# Altium PCB PCB.PcbDoc
Units mil, origin at the board's own origin, x right, y up, seen from the top; angles counter-clockwise.
Board outline 2305 x 3695 mil, 2 copper layers (Top Layer, Bottom Layer); 50 components, 62 nets, 204 pads, 75 vias.
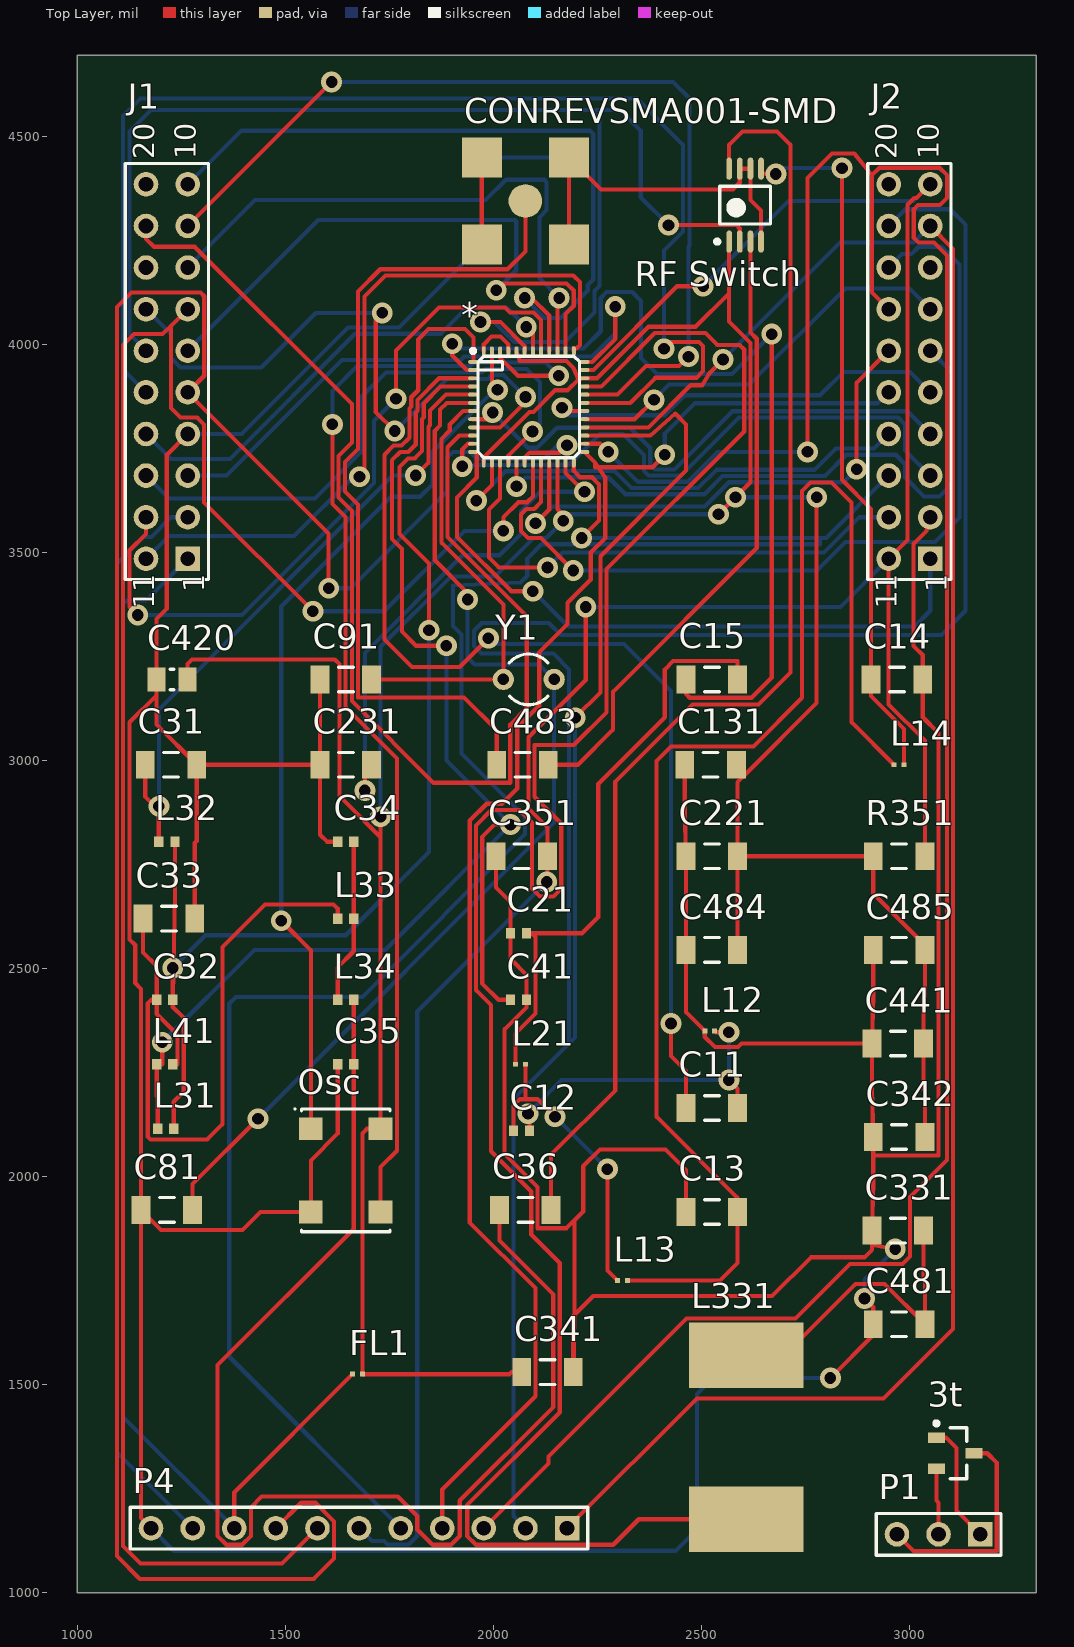
[diagram p0: Top Layer view]
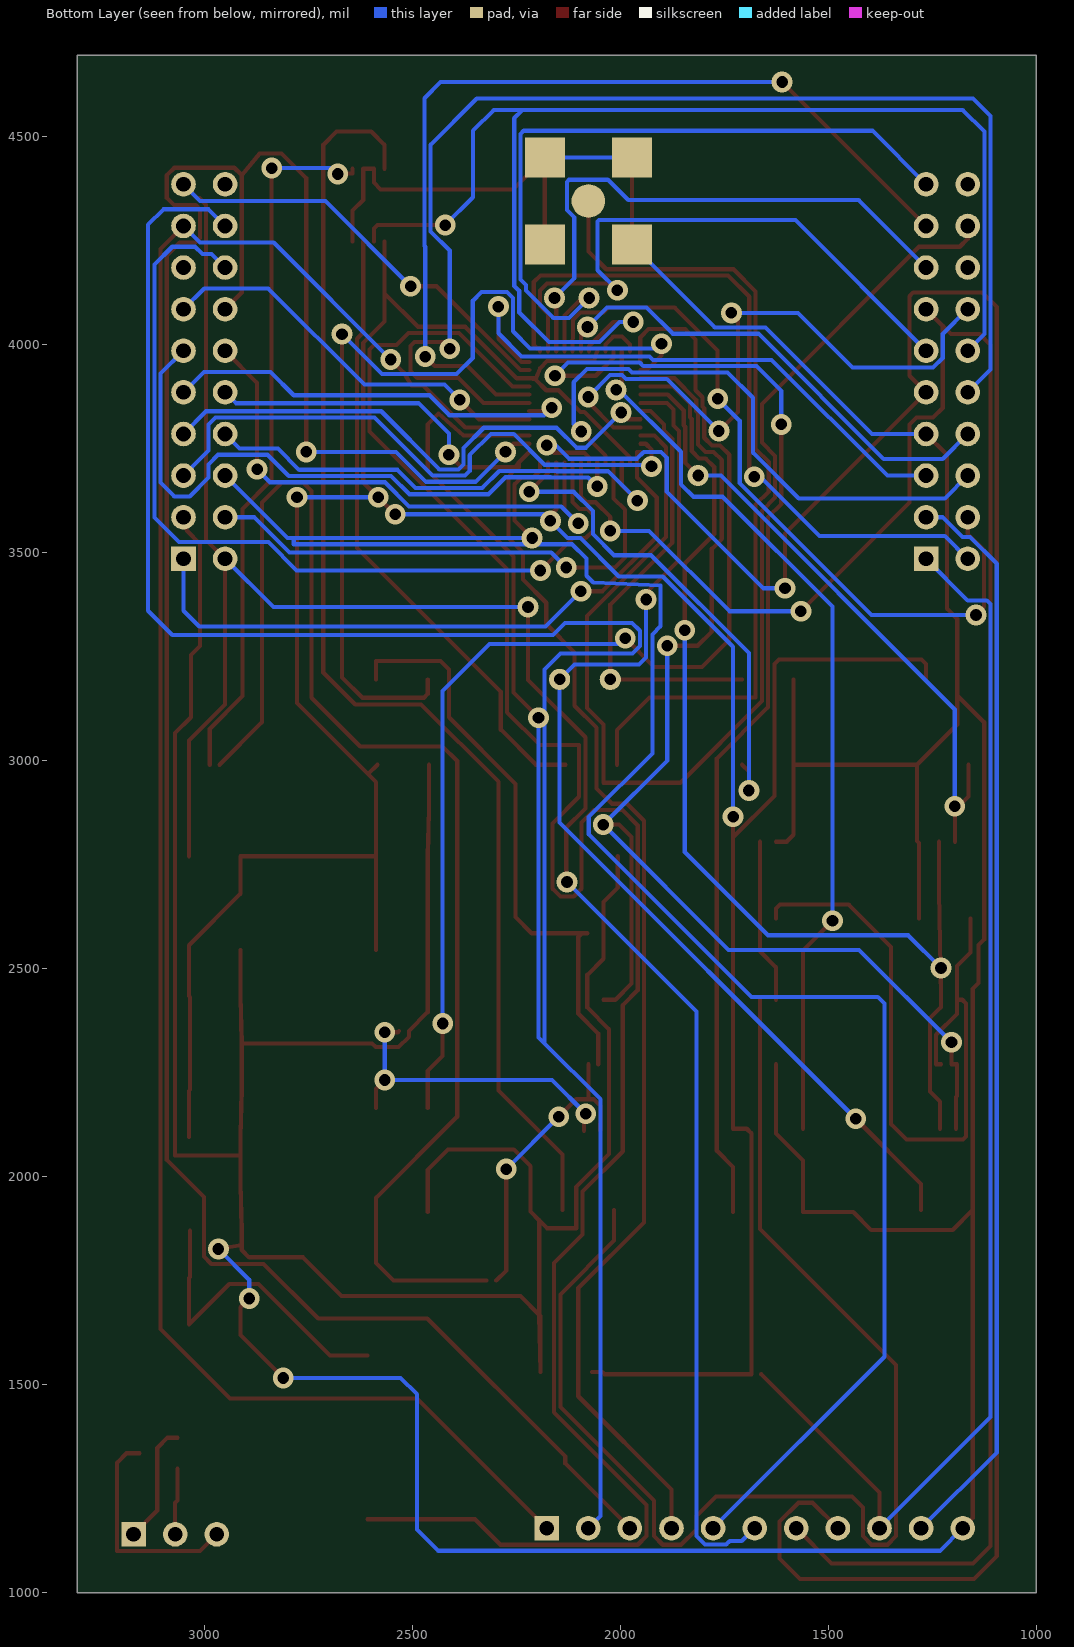
[diagram p1: Bottom Layer view, seen from below]

## Layer stack, top to bottom
Top Solder: solder mask 0.4, Solder Resist, Dk 3.5
Top Layer: signal copper 1.4
Dielectric 1: dielectric 12.6, FR-4, Dk 4.8
Bottom Layer: signal copper 1.4
Bottom Solder: solder mask 0.4, Solder Resist, Dk 3.5

## Board outline
1000,1000 3305,1000 3305,4695 1000,4695

## Design rules (kind name [scope] priority, off if disabled: settings)
Clearance [All] p1: gap=5 ignorepadtopadclearanceinfootprint=TRUE
PolygonConnect [All] p1: connectstyle=Relief reliefconductorwidth=10 reliefentries=4 polygonreliefangle="90 Angle" airgapwidth=10
RoutingVias [All] p1: holewidth=28 width=50 viastyle="Through Hole" minholewidth=28 minwidth=50 maxholewidth=28 maxwidth=50
SolderMaskExpansion [All] p1: expansion=4
Width [All] p1: maxlimit=10 minlimit=10 preferedwidth=10
30 further rules are at their usual default settings.

## Classes and differential pairs
component class Sheet2: J1 J2 P4
component class Sheet1: 3t * C11 C12 C13 C14 C15 C21 C31 C32 C33 C34 C35 C36 C41 C81 C91 C131 C221 C231 C331 C341 C342 C351 C420 C441 C481 C483 C484 C485 CONREVSMA001-SMD FL1 L12 L13 L14 L21 L31 L32 L33 L34 L41 L331 Osc P1 R351 "RF Switch" Y1

## Components (designator, comment, footprint, x,y, rotation, side; value= is the part's Value field where it differs from the comment)
3t "Temp" SOT95P237X112-3N 3110,1335 r0 top
* "CC1352R1F3RGZ_1" CC1352R 2085,3850 r0 top
C11 "Cap" "1206 Real" 2525,2165 r0 top value=12pF
C12 "Cap" "0402 Real" 2067.68,2110 r180 top value=1.1pF
C13 "Cap" "1206 Real" 2525,1915 r0 top value=1pF
C14 "Cap" "1206 Real" 2970,3195 r180 top value=1pF
C15 "Cap" "1206 Real" 2525,3195 r0 top value=12pF
C21 "Cap" "0402 Real" 2060,2585 r0 top value=1.1pF
C31 "Cap" "1206 Real" 1225,2990 r0 top value=100pF
C32 "Cap" "0402 Real" 1210,2425 r180 top value=3.6pF
C33 "Cap" "1206 Real" 1220,2620 r180 top value=2.7pF
C34 "Cap" "0402 Real" 1645,2805 r0 top value=6.2pF
C35 "Cap" "0402 Real" 1645,2270 r0 top value=3pF
C36 "Cap" "1206 Real" 2076.81,1920 r0 top value=100pF
C41 "Cap" "0402 Real" 2060,2425 r180 top value=3.6pF
C81 "Cap" "1206 Real" 1215,1920 r180 top value=12pF
C91 "Cap" "1206 Real" 1645.35,3195 r180 top value=12pF
C131 "Cap" "1206 Real" 2522.01,2990 r180 top value=0.1uF
C221 "Cap" "1206 Real" 2525,2770 r180 top value=0.1uF
C231 "Cap" "1206 Real" 1645.35,2990 r180 top value=1uF
C331 "Cap" "1206 Real" 2972.01,1870 r180 top value=22uF
C341 "Cap" "1206 Real" 2130,1530 r0 top value=22uF
C342 "Cap" "1206 Real" 2975,2095 r180 top value=0.1uF
C351 "Cap" "1206 Real" 2067.99,2770 r180 top value=0.1uF
C420 "Cap" "0805 Real" 1227.4,3195 r180 top value=0.01uF
C441 "Cap" "1206 Real" 2972.01,2320 r180 top value=0.1uF
C481 "Cap" "1206 Real" 2975,1645 r180 top value=0.1uF
C483 "Cap" "1206 Real" 2070,2990 r180 top value=12pF
C484 "Cap" "1206 Real" 2525,2545 r180 top value=12pF
C485 "Cap" "1206 Real" 2975,2545 r180 top value=12pF
CONREVSMA001-SMD "" SMA_Jack 2076.81,4345 r90 top
FL1 "BLM" "0201 Real" 1673.19,1525 r0 top value=2.4nH
J1 "SSQ-110-23-L-D" HDR2X10_CEN 1265,3485 r90 top
J2 "SSQ-110-23-L-D" HDR2X10_CEN 3050,3485 r90 top
L12 "Inductor" "0201 Real" 2520,2350 r180 top value=2.4nH
L13 "Inductor" "0201 Real" 2310,1750 r0 top value=1.5nH
L14 "Inductor" "0201 Real" 2975,2990 r0 top value=2nH
L21 "Inductor" "0201 Real" 2065,2270 r0 top value=2.4nH
L31 "Inductor" "0402 Real" 1212.32,2115 r180 top value=27nH
L32 "Inductor" "0402 Real" 1215,2805 r180 top value=7.5nH
L33 "Inductor" "0402 Real" 1645,2620 r0 top value=6.8nH
L34 "Inductor" "0402 Real" 1645,2425 r0 top value=6.8nH
L41 "Inductor" "0402 Real" 1210,2270 r0 top value=7.5nH
L331 "Inductor" "Non-Standard Inductor" 2607.4,1373.15 r90 top value=6.8mH
Osc "Osc" OSC 1645,2015 r0 top
P1 "Header 3" HDR1X3 3170,1140 r180 top
P4 "BB02-HJ221-KB1-603000" HDR1X11 2177.01,1155 r180 top
R351 "Res3" "1206 Real" 2975,2770 r180 top value=100K
"RF Switch" "PE4250" "RF Switch" 2605,4335 r90 top
Y1 "32.768kHz" R38 2085,3195 r270 top

## Footprints (in the part's own frame and the unit in brackets; to place one, negate y for a bottom-side part, rotate by r counter-clockwise, add the part's x,y. Pads: shape width x height; smd on the part's side, far side on the other; paste and mask are expansions set on the pad)
"0201 Real" [mm] "Chip Inductor, Body 1.0x0.5mm, IPC High Density"
  rect 0.3x0.3 smd: 1(-0.3,0) 2(0.3,0)
  body extent -0.32,-0.17 0.32,0.17, height 0.33
"0402 Real" [mm] "Radial Cap, Thru-Hole; 2 Leads; 0.3 in Pin Spacing"
  rect 0.56x0.64 smd: 1(-0.49,0) 2(0.49,0)
  body extent -0.55,-0.3 0.55,0.3, height 0.6
"0805 Real" [mm] "Radial Cap, Thru-Hole; 2 Leads; 0.3 in Pin Spacing"
  rect 1.1x1.45 smd: 1(-0.95,0) 2(0.95,0)
  silkscreen extent -0.1,-0.62 0.1,0.62, body extent -1.15,-0.72 1.15,0.72, height 1.15
"1206 Real" [mm] "Chip Capacitor, 2-Leads, Body 3.05x1.55mm, IPC Medium Density"
  rect 1.15x1.7 smd: 1(-1.575,0) 2(1.575,0)
  silkscreen extent -0.45,-0.75 0.45,0.75, body extent -1.6,-0.85 1.6,0.85, height 0.65
CC1352R [mm] "CQFP, 48-Leads, Body 7,40x7,40mm, Pitch 0,50mm, IPC Medium Density"
  oval 0.6x0.24 smd: 1(-3.4,2.75) 2(-3.4,2.25) 3(-3.4,1.75) 4(-3.4,1.25) 5(-3.4,0.75) 6(-3.4,0.25) 7(-3.4,-0.25) 8(-3.4,-0.75) 9(-3.4,-1.25) 10(-3.4,-1.75) 11(-3.4,-2.25) 12(-3.4,-2.75) 25(3.4,-2.75) 26(3.4,-2.25) 27(3.4,-1.75) 28(3.4,-1.25) 29(3.4,-0.75) 30(3.4,-0.25) 31(3.4,0.25) 32(3.4,0.75) 33(3.4,1.25) 34(3.4,1.75) 35(3.4,2.25) 36(3.4,2.75)
  oval 0.24x0.6 smd: 13(-2.75,-3.4) 14(-2.25,-3.4) 15(-1.75,-3.4) 16(-1.25,-3.4) 17(-0.75,-3.4) 18(-0.25,-3.4) 19(0.25,-3.4) 20(0.75,-3.4) 21(1.25,-3.4) 22(1.75,-3.4) 23(2.25,-3.4) 24(2.75,-3.4) 37(2.75,3.4) 38(2.25,3.4) 39(1.75,3.4) 40(1.25,3.4) 41(0.75,3.4) 42(0.25,3.4) 43(-0.25,3.4) 44(-0.75,3.4) 45(-1.25,3.4) 46(-1.75,3.4) 47(-2.25,3.4) 48(-2.75,3.4)
  silkscreen extent -3.52,-3.1 3.1,3.54, body extent -3.5,-3.5 6.98,3.5, height 1
HDR1X3 [mm] "Connector; Header; 3 Position"
  rect 1.5x1.5 hole 0.9: 1(0,0)
  round 1.5 hole 0.9: 2(2.54,0) 3(5.08,0)
  silkscreen extent -1.27,-1.27 6.35,1.27
HDR1X11 [mm] "Connector; Header; 11 Position"
  rect 1.5x1.5 hole 0.9: 1(0,0)
  round 1.5 hole 0.9: 2(2.54,0) 3(5.08,0) 4(7.62,0) 5(10.16,0) 6(12.7,0) 7(15.24,0) 8(17.78,0) 9(20.32,0) 10(22.86,0) 11(25.4,0)
  silkscreen extent -1.27,-1.27 26.67,1.27
HDR2X10_CEN [mm] "Connector; Header; 10x2 Position"
  rect 1.5x1.5 hole 0.9: 1(0,0)
  round 1.5 hole 0.9: 2(2.54,0) 3(5.08,0) 4(7.62,0) 5(10.16,0) 6(12.7,0) 7(15.24,0) 8(17.78,0) 9(20.32,0) 10(22.86,0) 11(0,2.54) 12(2.54,2.54) 13(5.08,2.54) 14(7.62,2.54) 15(10.16,2.54) 16(12.7,2.54) 17(15.24,2.54) 18(17.78,2.54) 19(20.32,2.54) 20(22.86,2.54)
  silkscreen extent -1.27,-1.27 24.13,3.81
"Non-Standard Inductor" [mm] "Chip Inductor, Body 1.0x0.5mm, IPC High Density"
  rect 4x7 smd: 1(-5,0) 2(5,0)
OSC [mm] "SON, 4-Leads, Body 7,00x5,08mm, Pitch 5,08mm, IPC Medium Density"
  rect 1.45x1.4 smd: 1O(-2.13,2.54) 2O(-2.13,-2.54) 3O(2.13,-2.54) 4O(2.13,2.54)
  silkscreen extent -3.15,-3.75 2.7,3.8, body extent -2.54,-2.54 2.54,2.54, height 1.27
R38 [mm] "Crystal, Thru-Hole; 2 Leads; Body 3.1 x 8.2 mm (Dia.xH)"
  round 1.3 hole 0.7: 1(0,1.55) 2(0,-1.55)
  silkscreen extent -1.55,-1.19 1.55,1.17
"RF Switch" [mm] "TSOP, 8-Leads, Body 3.00x3.00mm, Pitch 0.65mm, IPC Medium Density"
  oval 1.35x0.35 smd: 1P(-2.225,0.975) 2P(-2.225,0.325) 3P(-2.225,-0.325) 4P(-2.225,-0.975) 5P(2.225,-0.975) 6P(2.225,-0.325) 7P(2.225,0.325) 8P(2.225,0.975)
  silkscreen extent -2.35,-1.55 1.15,1.82, body extent -1.55,-1.55 1.55,1.55, height 0.92
SMA_Jack [mm] "Connector; RF Coaxial, MMCX, Thru-Hole; 5 Position; Vertical"
  round 2.05 all layers, no hole: 1(0,0)
  rect 2.44x2.44 all layers, no hole: 2(-2.66,2.66) 3(-2.66,-2.66) 4(2.66,2.66) 5(2.66,-2.66)
SOT95P237X112-3N [mm] "SOT23, 3-Leads, Body 2,86x2,37mm, Pitch 0,95mm, IPC Medium Density"
  rect 1.05x0.65 smd: 1T(-1.15,0.95) 2T(-1.15,-0.95) 3T(1.15,0)
  silkscreen extent -1.27,-1.55 0.7,1.95, body extent -0.7,-1.52 0.7,1.53, height 1.12

## Part data
C11 C12 C13 C14 C15 C21 C31 C32 C33 C34 C35 C36 C41 C81 C91 C131 C221 C231 C331 C341 C342 C351 C420 C441 C481 C483 C484 C485: "Capacitor", LatestRevisionDate=17-Jul-2002, LatestRevisionNote="Re-released for DXP Platform.", PackageDescription="Radial Cap, Thru-Hole; 2 Leads; 0.3 in Pin Spacing", PackageReference=RAD-0.3, Published=8-Jun-2000, Publisher="Altium Limited"
CONREVSMA001-SMD: library part COAX-M, "RF Coaxial PCB Connector, MMCX; Thru-Hole, Vertical Mount Plug,  50 Ohm Impedance", PackageDocument="Rev. A, 16-Jun-1997", ComponentLink1Description="Manufacturer Link", ComponentLink1URL=http://www.amphenolrf.com/, DatasheetDocument=30-May-2003, DrillSize="Corresponds to nominal value.", LatestRevisionDate=15-Jul-2004, LatestRevisionNote="Component Replaced.", PackageReference=908-21103, PCB_Layout="Complies with manufacturer's recommendation.", Published=15-Jul-2004, Publisher="Altium Limited"
FL1: library part Inductor, "Inductor", Code_IEC=1005, Code_JEITA=0402, LatestRevisionDate=29-May-2009, LatestRevisionNote="IPC-7351 Footprint Added.", PackageDescription="Chip Inductor", PackageReference=0402-A, Published=8-Jun-2000, Publisher="Altium Limited"
P1: "Header, 3-Pin", LatestRevisionDate=17-Jul-2002, LatestRevisionNote="Re-released for DXP Platform.", Publisher="Altium Limited"
P4: library part "Header 11", "Header, 11-Pin", LatestRevisionDate=17-Jul-2002, LatestRevisionNote="Re-released for DXP Platform.", Publisher="Altium Limited"
R351: "Resistor", LatestRevisionDate=29-May-2009, LatestRevisionNote="IPC-7351 Footprint Added.", PackageDescription="Chip Resistor", PackageReference=J1-0603, Published=8-Jun-2000, Publisher="Altium Limited"
Y1: library part XTAL, "Crystal Oscillator", LatestRevisionDate=17-Jul-2002, LatestRevisionNote="Re-released for DXP Platform.", PackageDescription="Crystal, Thru-Hole; 2 Leads; Body 3.1 x 8.2 mm (Dia.xH)", PackageReference=R38, Published=8-Jun-2000, Publisher="Altium Limited"
L12 L13 L14 L21 L31 L32 L33 L34 L41 L331: Code_IEC=1005, Code_JEITA=0402, LatestRevisionDate=29-May-2009, LatestRevisionNote="IPC-7351 Footprint Added.", PackageDescription="Chip Inductor", PackageReference=0402-A, Published=8-Jun-2000, Publisher="Altium Limited"

## Via types
v1: diameter 50, hole 28, Top Layer to Bottom Layer, 75 vias

## Nets (pads, with @x,y where several pads share a name; then routed paths per layer and width w, separated by ;. In a path a pad name is that pad's centre, name@x,y a point inside that pad or via, vN(x,y) a via of type N, cw(c..) or ccw(c..) an arc to the next point about the centre after c; other vN are vias at no path point)
5V0_BP: J1.2 P4.10 | length 2609.8
  Bottom Layer w10: J1.2 1225.42,3585 1177.8,3537.38 1159.38,3537.38 1095,3473 1095,1337.01 P4.10
DCDC_SW: *.33 L331.1 | length 5035.8
  Top Layer w10: *.33 2259.39,3899.21 2387.85,4027.67 2509.5,4027.67 2538.17,3999 2592,3999 2603,3988 2603,3791 2272,3460 2272,3116 2193,3037 2099,3037 2099,2913 2163,2849 2163,2692 2144,2673 2112,2673 2093,2692 2093,2851 2063,2881 1994.76,2881 1958,2844.24 1958,2448 1994,2412 1994,2061 2091,1964 2091,1861 2159.37,1792.63 2159.37,1433.37 1937,1211 1937,1136 1958,1115 2288,1115 2349.3,1176.3 L331.1
DIO3: *.8 J2.4 | length 1305.1
  Top Layer w10: *.8 1982,3820.47 v1(1998,3836.47)
  Bottom Layer w10: v1(1998,3836.47) 2082.47,3752 2105.33,3752 2153.33,3800 2328.13,3800 2377,3751.13 2377,3712 2389,3700 2435,3700 2574.53,3839.53 2995.47,3839.53 J2.4
DIO4_SCL: *.9 J1.17 | length 1578.1
  Top Layer w10: v1(1733,4076) 1717,4060 1717,3838 v1(1763,3792) ; *.9 2016,3800.79 2077,3861.79 v1(2077,3874)
  Bottom Layer w10: J1.17 1225,4025 1225,3968 1248,3945 1442,3945 1573,4076 v1(1733,4076) ; v1(1763,3792) 1888.17,3917.17 1986.68,3917.17 1995.98,3926.47 2024.53,3926.47 v1(2077,3874)
DIO5_SDA: *.10 J1.19 | length 2867.3
  Top Layer w10: J1.19 1165,4254 1184,4235 1282,4235 1659.72,3857.28 1659.72,3764.13 1628,3732.41 1628,3632 1659.72,3600.28 1659.72,3142.81 1856,2946.53 2040.63,2946.53 2040.63,3086.63 2080,3126 2080,3347.19 1890,3537.19 1890,3753.15 1917.95,3781.1 *.10
DIO6_RLED: *.11 J2.3 | length 1445.7
  Top Layer w10: v1(1925,3707) 1925,3747.67 1938.75,3761.42 *.11
  Bottom Layer w10: v1(1925,3707) 1928.57,3710.57 2137.57,3710.57 2138,3711 2182,3711 2256,3785 2311,3785 2362,3734 2362,3696 2373,3685 2451,3685 2590.53,3824.53 2973,3824.53 2989.53,3808 2989.53,3745.47 J2.3
DIO7_GLED: *.12 J2.1 | length 1600.3
  Top Layer w10: *.12 1960,3741.73 1960,3680 1912.49,3632.49 1912.49,3537.4 2042.8,3407.1 v1(2094.81,3407.1)
  Bottom Layer w10: v1(2094.81,3407.1) 2179.91,3322 3012,3322 3050,3360 J2.1
DIO8_MISO: *.14 J2.14 | length 1198
  Top Layer w10: v1(1959,3624.89) 1996.42,3662.31 *.14
  Bottom Layer w10: v1(1959,3624.89) 2029.68,3695.57 2152.57,3695.57 2153,3696 2291,3696 2332,3655 2492,3655 2535.88,3698.88 2771.87,3698.88 2822.99,3750 2915,3750 J2.14
DIO9_MOSI: *.15 J2.12 | length 1260.4
  Top Layer w10: *.15 2016.1,3630.1 1989,3603 1989,3488 2013,3464 v1(2130,3464)
  Bottom Layer w10: v1(2130,3464) 2166,3500 2795,3500 2880,3585 J2.12
DIO10_SCLK: *.16 J1.13 | length 1414.3
  Top Layer w10: *.16 2035.79,3732.79 v1(2094,3791)
  Bottom Layer w10: J1.13 1220,3630 1571,3630 1681,3740 1681,3872 1742,3933 1972,3933 1980.47,3941.47 2080,3941.47 2112,3909.47 2112,3809 v1(2094,3791)
DIO11_CS: *.17 J2.6 | length 1585.7
  Top Layer w10: v1(2055.47,3659) *.17
  Bottom Layer w10: v1(2055.47,3659) 2077.04,3680.57 2167.57,3680.57 2168,3681 2276,3681 2317,3640 2507,3640 2550.88,3683.88 2796.88,3683.88 2848,3735 2967,3735 2990,3712 2990,3680 3035,3635 3072,3635 3105,3668 3105,3930 J2.6
DIO14_BTN2: *.20 J2.18 | length 2157.9
  Top Layer w10: *.20 2114.53,3621.41 2098.12,3605 2079,3605 2066,3592 2066,3552 2083,3535 2114,3535 v1(2192,3457)
  Bottom Layer w10: v1(2192,3457) 2778,3457 2846,3525 3061,3525 3120,3584 3120,4192 3077,4235 3022.27,4235 3004.53,4217.26 2982.26,4217.26 J2.18
DIO15_BTN1: *.21 J2.16 | length 1302.6
  Top Layer w10: v1(2101,3570) 2134.21,3603.21 *.21 ; v1(2873,3700) 2873,3908 J2.16
  Bottom Layer w10: v1(2101,3570) 2142,3611 2508,3611 2565.88,3668.88 2841.88,3668.88 v1(2873,3700)
DIO16_TDO: *.26 J2.17 P4.3 | length 6058.2
  Top Layer w10: P4.3 2132.15,1310.14 2132.15,1327.15 2464,1659 2726,1659 2857.29,1790.29 2983.29,1790.29 3001,1808 3001,1951.11 3090,2040.11 3090,4214 3059,4245 3021.47,4245 3010.47,4256 3010.47,4325 3020.47,4335 3073,4335 3090,4352 3090,4407 3072,4425 2928,4425 2910,4407 ; *.26 2256.58,3761.42 v1(2276,3742) ; v1(2755,3742) 2755,4400 2814,4459 2867,4459 2910,4407 ; J2.17 2910,4125 2910,4407
  Bottom Layer w10: v1(2276,3742) 2348,3670 2467,3670 2539,3742 v1(2755,3742)
DIO17_TDI: *.27 J2.19 P4.2 | length 6670.8
  Top Layer w10: v1(2196.5,3103) 2257,3163.5 2257,3491 2463,3697 2463,3808 2437,3834 2377.1,3781.1 *.27
  Bottom Layer w10: P4.2 2048,1184.01 2048,2186 2182,2320 ; v1(2196.5,3103) 2196.5,2334.5 2182,2320 ; J2.19 2990,4325 3098,4325 3135,4288 3135,3360 3077,3302 2162,3302 2133,3331 1972,3331 1953,3312 1953,3275 1971,3257 2144,3257 2182,3219 2182,2320
DIO19_CTS: *.29 J2.7 | length 982.1
  Top Layer w10: *.29 2339.47,3820.47 v1(2386,3867)
  Bottom Layer w10: v1(2386,3867) 2422.5,3903.5 2614.84,3903.5 2846.34,4135 3000,4135 J2.7
DIO20_Flash_CS: *.30 J2.5 | length 1012.9
  Top Layer w10: v1(2165,3848) 2172.84,3840.16 *.30
  Bottom Layer w10: v1(2165,3848) 2183,3830 2411,3830 2459,3878 2785,3878 2841,3934 3001,3934 J2.5
DIO21: *.31 J1.15 | length 3087
  Top Layer w10: *.31 2328.95,3859.84 2389.11,3920 2488,3920 2504,3936 2504,3996.5 2494.5,4006 2426,4006 v1(2410,3990)
  Bottom Layer w10: J1.15 1110,3940 1110,4549 1152,4591 2345,4591 2456,4480 2456,4272 2410,4226 v1(2410,3990)
DIO22: *.32 J1.9 | length 2275.3
  Top Layer w10: J1.9 v1(1611,4631) ; *.32 2298.53,3879.53 2367,3948 2446,3948 v1(2469,3971)
  Bottom Layer w10: v1(1611,4631) 2432,4631 2471,4592 2471,4237 2469,4235 v1(2469,3971)
DIO23_Analog: *.36 J1.3 | length 1408.1
  Top Layer w10: *.36 2237.53,3958.27 2293,4013.74 v1(2293,4091.07)
  Bottom Layer w10: J1.3 1358.06,3685 1636.18,3963.12 1921.65,3963.12 1930,3971.47 2237.4,3971.47 2293,4027.07 v1(2293,4091.07)
DIO24_Analog: *.37 J1.11 | length 1754.5
  Top Layer w10: v1(1678,3682) 1690,3694 1690,4115 1741,4166 2192,4166 2208,4150 2208,3999 2200,3991 2193.27,3991 *.37
  Bottom Layer w10: J1.11 1220,3540 1521,3540 1663,3682 v1(1678,3682)
DIO25_Analog: *.38 J1.6 | length 1460.3
  Top Layer w10: v1(2007,4130.63) 2023.37,4147 2176,4147 2193,4130 2193,4093 2173.58,4073.58 *.38
  Bottom Layer w10: J1.6 1579,4299 2051.6,4299 2055,4295.6 2055,4178.63 v1(2007,4130.63)
DIO26_Analog: *.39 J1.8 | length 1388.2
  Top Layer w10: *.39 2153.9,4107.9 v1(2158,4112)
  Bottom Layer w10: J1.8 1427,4347 1981,4347 2030,4396 2123,4396 2128,4391 2128,4323 2110.53,4305.53 2110.53,4159.47 v1(2158,4112)
DIO27_Analog: *.40 J1.10 | length 1775
  Top Layer w10: v1(2075,4112) 2092,4112 2134.21,4069.79 *.40
  Bottom Layer w10: J1.10 1394,4514 2232,4514 2240,4506 2240,4156.07 2226.76,4142.83 2226.76,4129.76 2161,4064 2123,4064 v1(2075,4112)
DIO28_Analog: *.41 J1.12 | length 1777.8
  Top Layer w10: v1(1145,3350) 1125.47,3369.53 1125.47,3505.47 1165,3545 J1.12 ; v1(1766,3869.69) 1766,3985.75 1869.25,4089 2028,4089 2040,4077 2096,4077 2114,4059 2114,4043 *.41
  Bottom Layer w10: v1(1145,3350) 1396,3350 1713,3667 1713,3816.69 v1(1766,3869.69)
DIO29_Analog: *.42 J1.14 | length 1173.8
  Top Layer w10: v1(2079,4042) 2094.84,4026.16 *.42
  Bottom Layer w10: J1.14 1225,3725 1366.94,3725 1667.94,4026 1874,4026 1937,4089 2032,4089 v1(2079,4042)
GND: "RF Switch.4P" "RF Switch.6P" "RF Switch.7P" C13.1 C14.1 C21.1 C31.2 C33.1 C34.1 C35.1 C41.1 C81.2 C91.2 C131.2 C221.2 C231.2 C331.2 C341.2 C342.2 C351.2 C420.2 C441.2 C481.2 C484.2 C485.2 CONREVSMA001-SMD.2 CONREVSMA001-SMD.3 CONREVSMA001-SMD.4 CONREVSMA001-SMD.5 J1.4 J2.2 L12.2 Osc.2O P4.11 | length 15942.6
  Top Layer w10: P4.11 1152.99,1179.02 C81.2 ; J1.4 1215,3735 1215,3365 1190,3340 C420.2 1190,3156.65 ; C33.1 1282.01,2802 1287.01,2807 C31.2 ; C91.2 C231.2 ; C35.1 1625.71,2103.46 1561.14,2038.9 Osc.2O 1440,1915 1397,1872 1200.99,1872 C81.2 ; C34.1 1600,2805 1583.35,2821.65 C231.2 ; CONREVSMA001-SMD.2 CONREVSMA001-SMD.4 ; C351.2 2005.98,2694.72 2040.71,2660 C21.1 2040.71,2523.58 2079.29,2485 C41.1 2079.29,2406.29 2027,2354 2027,2053.98 2106,1974.98 2106,1876 2176,1876 2195,1895 ; CONREVSMA001-SMD.3 CONREVSMA001-SMD.5 2258.26,4373 2576,4373 2592.2,4389.2 2592.2,4422.6 2617.8,4422.6 2617.8,4347.59 2643.39,4322 2643.39,4247.4 ; C131.2 2460,2882.99 C221.2 C484.2 2462.99,2395.2 L12.2 2508,2350 2508,2336 2532.84,2311.16 2587.68,2311.16 2596.52,2320 C441.2 ; C13.1 2462.99,2016 2413.99,2065 2256,2065 2216,2025 2216,1916 2195,1895 ; v1(2810,1516) 2912.99,1618.99 C481.2 2912.99,1686.01 v1(2892,1707) ; C485.2 2912.99,2434.99 C441.2 ; v1(2966,1826) 2910,1836 ; J2.2 3041,3552 3010,3521 3010,3275.47 3032.01,3253.47 C14.1 3032.01,3104 3070,3066.01 3070,2051 2912.99,2051 ; C81.2 1152.99,2451.01 1139,2465 1139,2556.35 1125.35,2570 1125.35,3092 1190,3156.65 ; 1190,3156.65 1190,3087.01 C31.2 ; C31.2 C231.2 ; 2195,1668 2240,1713 2670,1713 2763,1806 2892,1806 2910,1824 2910,1836 ; 2195,1668 2192.01,1665.01 C341.2 2195,1668 ; 2195,1668 2195,1895 ; 2910,1836 C331.2 2912.99,1984.99 2912.99,2051 ; C441.2 2910,2210.99 C342.2 2912.99,2051
  Bottom Layer w10: P4.11 1231.54,1100.47 2437.47,1100.47 2489,1152 2489,1477 2528,1516 v1(2810,1516) ; J1.4 1394.96,3785 1650.96,4041 1772.81,4041 CONREVSMA001-SMD.2 ; CONREVSMA001-SMD.4 CONREVSMA001-SMD.5 ; v1(2892,1707) 2892,1752 v1(2966,1826)
Net3t_1T: 3t.1T P1.1 | length 289.6
  Top Layer w10: 3t.1T 3088,1372.4 3113,1347.4 3113,1197 P1.1
Net3t_2T: 3t.2T P1.2 | length 159.8
  Top Layer w10: 3t.2T 3064.72,1221.28 3070,1216 P1.2
Net3t_3T: 3t.3T P1.3 | length 532.8
  Top Layer w10: P1.3 3010,1100 3210,1100 3210,1312 3187,1335 3t.3T
Net*_1: *.1 C11.1 | length 2795
  Top Layer w10: *.1 1952,3958.27 1952,4017 1932,4037 1844,4037 1819.42,4012.42 1819.42,3890.04 1802.56,3873.18 1802.56,3850.81 1798.32,3846.56 1798.32,3776 1779.32,3757 1760,3757 1738,3735 1738,3291 1804,3225 1919.05,3225 v1(1988,3293.95) ; v1(2427,2368) 2427,2289.99 2462.99,2254 C11.1
  Bottom Layer w10: v1(1988,3293.95) 1988,3288 1996,3280 2314,3280 2427,3167 v1(2427,2368)
Net*_2: *.2 C15.1 | length 2260.4
  Top Layer w10: v1(1901,4002) 1901,3973.58 1936,3938.58 *.2 ; C15.1 2462.99,3160 2471.99,3151 2620,3151 2669,3200 v1(2669,4025)
  Bottom Layer w10: v1(1901,4002) 1912.24,3990.76 2216.76,3990.76 2258,4032 2258,4112.07 2272,4126.07 2333.65,4126.07 2354.7,4105.02 2354.7,3968 2393.7,3929 2573,3929 v1(2669,4025)
Net*_3: *.3 C41.2 L31.2 L41.1 | length 3165.9
  Top Layer w10: L31.2 1193.03,2191 1190.71,2193.32 L41.1 1204,2270 v1(1204,2323) ; v1(1887,3276) 1814,3276 1780,3310 1780,3509 1756,3533 1756,3722 1776,3742 1795.32,3742 1813.32,3760 1813.32,3836 1817.56,3840.24 1817.56,3866.97 1869.49,3918.9 *.3 ; C41.2 2012,2425 1973,2464 1973,2816 2003,2846 v1(2041,2846)
  Bottom Layer w10: v1(1204,2323) 1426,2545 1740,2545 v1(2041,2846) 1887,3000 v1(1887,3276)
Net*_4: *.4 C32.1 L31.1 L32.1 | length 2795.3
  Top Layer w10: v1(1229.29,2501.29) C32.1 ; L31.1 1231.61,2180 1255.8,2204.19 1255.8,2380.71 1229.29,2407.22 C32.1 ; L32.1 1234.29,2684.29 1230.76,2501.26 C32.1 ; v1(1845,3313) 1845,3474 1774.24,3544.76 1774.24,3705.93 1794.76,3726.44 1810.76,3726.44 1828.32,3744 1828.32,3820.81 1832.56,3825.05 1832.56,3858.56 1873.21,3899.21 *.4
  Bottom Layer w10: v1(1229.29,2501.29) 1308,2580 1645,2580 1845,2780 v1(1845,3313)
Net*_6: *.6 C81.1 Y1.1 | length 2584.7
  Top Layer w10: C81.1 1277.01,1982.01 v1(1433.99,2138.99) ; v1(1938,3387) 1938,3403 1859,3482 1859,3792 1872,3805 1872,3843.84 1888,3859.84 *.6
  Bottom Layer w10: v1(1433.99,2138.99) 2146.02,2851.02 Y1.1 2110.02,3231 1955,3231 1938,3248 v1(1938,3387)
Net*_7: *.7 C91.1 Y1.2 | length 1069.7
  Top Layer w10: C91.1 1707.36,3194.59 1950,3194.59 1950.41,3195 Y1.2 2023.98,3374.7 1875,3523.68 1875,3773 1895,3793 1895,3808 1927.16,3840.16 *.7
Net*_13: "RF Switch.1P" *.13 *.22 *.34 *.44 C131.1 C221.1 C341.1 C342.1 C420.1 C441.1 C484.1 C485.1 FL1.2 Osc.4O R351.2 | length 8257.5
  Top Layer w10: C420.1 1264.8,3232 1275.8,3243 1618.72,3243 1629.72,3232 1629.72,2914.81 1728.86,2815.67 ; v1(1728.86,2865) 1728.86,2815.67 ; *.13 1976.73,3728 2086.48,3837.74 2096,3837.74 2148.26,3890 2177.9,3890 2204.09,3916.19 ; *.44 2063.47,3960 2176,3960 2192.28,3943.72 2204.09,3916.19 ; C341.1 2043.33,1530 2038.33,1525 FL1.2 1685,2104 1696,2115 Osc.4O 1728.86,2815.67 ; *.22 2153.9,3604 2168,3589.9 v1(2168,3576) ; v1(2541,3592) v1(2582,3633) 2618,3669 2618,4004 2566.61,4055.39 2566.61,4123.13 ; 2566.61,4247.4 2566.61,4123.13 ; C131.1 C131.1@2606.51,2967.5 ; C484.1 C221.1 ; v1(2777,3633) 2777,3137.99 C131.1@2606.51,2967.5 ; C342.1 3037.01,2206 3034.02,2208.99 C441.1 3034.02,2431 3037.01,2433.99 C485.1 3037.01,2556 2912.99,2680.02 R351.2 C221.1 ; 2204.09,3916.19 2206.8,3918.9 *.34 ; 2204.09,3916.19 *.34 ; *.34 2249.08,3918.9 2372.85,4042.67 2486.15,4042.67 2566.61,4123.13 ; C221.1 2587.01,2948 C131.1@2606.51,2967.5
  Bottom Layer w10: v1(1728.86,2865) 1728.86,3273.5 1898,3442.64 2003.64,3442.64 2096,3535 2127,3535 v1(2168,3576) 2184,3592 v1(2541,3592) ; v1(2582,3633) v1(2777,3633)
Net*_23: *.23 C231.1 | length 1209.3
  Top Layer w10: v1(1691,2928) 1691,2973.64 C231.1 ; *.23 2173.58,3691.42 v1(2219,3646)
  Bottom Layer w10: v1(1691,2928) 1691,3258.59 1925.84,3493.43 2014.96,3493.43 2066,3544.48 2066,3600 2112,3646 v1(2219,3646)
Net*_45: *.45 *.48 | length 107.1
  Top Layer w10: *.48 1976.73,4000 1995.73,4019 2016.79,4019 2035.79,4000 *.45
Net*_46: *.46 Osc.3O | length 2813.6
  Top Layer w10: v1(1613,3808) 1613,3617 1644.72,3585.28 1644.72,3128.28 1768,3005 1768,2062.14 1728.86,2023 Osc.3O ; *.46 2016.1,3968 2059.1,3925 v1(2157,3925)
  Bottom Layer w10: v1(1613,3808) 1613,3888.3 1672.81,3948.12 1945,3948.12 1953.35,3956.47 2125.53,3956.47 v1(2157,3925)
Net*_47: *.47 Osc.1O | length 2164.6
  Top Layer w10: v1(1490,2615) 1561.14,2543.86 Osc.1O ; *.47 1996.42,3904.58 v1(2010,3891)
  Bottom Layer w10: v1(1490,2615) 1490,3370 1754,3634 1824,3634 1854,3664 1854,3742.33 2002.67,3891 v1(2010,3891)
NetC11_2: C11.2 C12.1 L12.1 | length 785.3
  Top Layer w10: v1(2083,2151) 2086.97,2147.03 C12.1 ; L12.1 2534.81,2347 v1(2566,2347) ; v1(2566,2232) 2587.01,2210.99 C11.2
  Bottom Layer w10: v1(2083,2151) 2164,2232 v1(2566,2232) v1(2566,2347)
NetC12_2: C12.2 L13.1 L21.2 | length 724.4
  Top Layer w10: C12.2 2048.39,2127.61 2048,2128 2048,2170.03 2064,2186.03 2076.81,2186.03 ; L21.2 2076.81,2186.03 ; v1(2148,2144) 2105.97,2186.03 2076.81,2186.03 ; v1(2274,2018) 2274,1774.19 L13.1
  Bottom Layer w10: v1(2148,2144) v1(2274,2018)
NetC13_2: C13.2 L13.2 L14.1 | length 3299.8
  Top Layer w10: L13.2 2545.01,1750 2587.01,1792 C13.2 2587.01,1948.99 2392,2144 2392,2999 2427,3034 2625,3034 2742,3151 2742,3648 2762,3668 2813,3668 2861,3620 2861,3092.19 L14.1
NetC14_2: "RF Switch.5P" C14.2 L14.2 | length 1708.1
  Top Layer w10: 2643.39,4422.6 2643.39,4411 2678,4411 v1(2679,4410) ; v1(2838,4424) 2838,3674.94 2907.99,3604.95 C14.2 2907.99,3154.82 2986.81,3076 L14.2
  Bottom Layer w10: v1(2679,4410) 2693,4424 v1(2838,4424)
NetC15_2: C15.2 C21.2 L21.1 | length 1416
  Top Layer w10: L21.1 2053.19,2344 2101,2391.81 2101,2576 2092,2585 ; C21.2 2092,2585 ; C15.2 2587.01,3239 2432,3239 2412,3219 2412,3104 2252,2944 2252,2624 2213,2585 2092,2585
NetC32_2: C32.2 C33.2 L33.1 L41.2 | length 1712.8
  Top Layer w10: C33.2 1157.99,2538.72 1190.71,2506 C32.2 ; L41.2 1240.8,2270 1240.8,2340.91 1190.71,2391.01 C32.2 ; L33.1 1625.71,2644.29 1616,2654 1451,2654 1349,2552 1349,2125.99 1312,2088.99 1176.01,2088.99 1169,2096 1169,2416 1178,2425 C32.2
NetC34_2: C34.2 L33.2 L34.1 | length 396
  Top Layer w10: L34.1 1625.71,2503 1664.29,2541.58 L33.2 C34.2
NetC35_2: C35.2 C36.1 L34.2 | length 3109.9
  Top Layer w10: L34.2 C35.2 1664.29,1874.29 1337,1547 1337,1136 1358,1115 1396,1115 1417,1136 1417,1205 1443,1231 1770,1231 1817,1184 1817,1152 1854,1115 1898,1115 1919,1136 1919,1221 2144,1446 2144,1716.8 2014.8,1846 C36.1
NetC36_2: "RF Switch.8P" C36.2 | length 3122.3
  Top Layer w10: C36.2 2138.82,2053 2293,2207.18 2293,2949.24 2478.76,3135 2637.17,3135 2714,3211.83 2714,4480 2682,4512 2598.61,4512 2566.61,4480 2566.61,4422.6
NetC331_1: C331.1 C481.1 L331.2 | length 767.3
  Top Layer w10: L331.2 2698,1570 2870,1742 2940.01,1742 C481.1 3037.01,1756 3034.02,1758.99 C331.1
NetC483_1: "RF Switch.3P" C483.1 | length 1512.8
  Top Layer w10: C483.1 2203.04,2990 2287.21,3074.16 2287.21,3165.21 2633,3511 2633,4013.8 2617.8,4029 2617.8,4247.4
NetC483_2: C483.2 CONREVSMA001-SMD.1 | length 2014.2
  Top Layer w10: C483.2 2007.99,3073 1929.46,3151.53 1674.72,3151.53 1674.72,3615.28 1643,3647 1643,3717.41 1674.72,3749.13 1674.72,4127.72 1728,4181 2033.81,4181 2076.81,4224 CONREVSMA001-SMD.1
NetFL1_1: FL1.1 J1.1 P4.9 | length 3019.5
  Top Layer w10: P4.9 1377.01,1240.63 FL1.1
  Bottom Layer w10: J1.1 1165.03,3385.03 1119.03,3385.03 1110,3376 1110,1422.01 P4.9
RF_SWITCH: "RF Switch.2P" *.43 J1.16 | length 3241.5
  Top Layer w10: v1(1969,4054) 2017,4054 2075.16,3995.84 *.43 ; v1(2421,4287) 2584,4287 2592.2,4278.8 2592.2,4247.4
  Bottom Layer w10: J1.16 1125,4025 1125,4512 1177,4564 2235,4564 ; v1(1969,4054) 2001.76,4054 2050,4005.76 2171.69,4005.76 2243,4077.07 2243,4129.07 2255,4141.07 2255,4544 2235,4564 ; v1(2421,4287) 2354,4354 2354,4514 2304,4564 2235,4564
RX_TX: *.5 C31.1 L32.2 | length 1580.3
  Top Layer w10: C31.1 1162.99,2913.72 v1@1195.71,2881 ; L32.2 v1@1195.71,2881 ; v1(1196,2890) 1195.71,2889.71 v1@1195.71,2881 ; v1(1813,3685) 1844,3716 1844,3802.24 1847.56,3805.81 1847.56,3841.04 1886.05,3879.53 *.5
  Bottom Layer w10: v1(1196,2890) 1196,3123 1758,3685 v1(1813,3685)
WMCU_RESET: *.35 C351.1 J2.10 J2.11 P4.6 R351.1 | length 6091.5
  Top Layer w10: v1(2128,2708) 2130,2710 C351.1 2130,2839 2084,2885 2084,3056 2222,3194 v1(2222,3369) ; *.35 2240.2,3938.58 2441.61,4140 v1(2504,4140) ; R351.1 3037.01,3047.99 2950,3135 J2.11 2995.47,3530.47 2995.47,4336 3011.54,4352.07 3017.07,4352.07 J2.10
  Bottom Layer w10: P4.6 1708.01,1124 1737,1124 1745.53,1115.47 1796.47,1115.47 1817,1136 1817,2397 v1(2128,2708) ; v1(2222,3369) 2834,3369 J2.11 ; v1(2504,4140) 2709,4345 3010,4345 J2.10
WMCU_RXD: *.18 J1.5 P4.8 | length 5830.2
  Top Layer w10: P4.8 1538.01,1216 1572.01,1216 1617,1171.01 1617,1082 1568,1033 1150,1033 1095,1088 1095,4090 1130,4125 1296,4125 1305,4116 1305,3925 J1.5 1604,3546 v1(1604,3414) ; *.18 2075.16,3728 2087.16,3740 2159,3740 v1(2177,3758)
  Bottom Layer w10: v1(1604,3414) 1656.12,3414 1888.47,3646.35 1888.47,3728 1902.47,3742 1943.57,3742 1960,3725.57 2123,3725.57 2155.43,3758 v1(2177,3758)
WMCU_SWO: *.28 J2.9 P4.1 | length 4836.5
  Top Layer w10: P4.1 2489.01,1467 2938,1467 3105,1634 3105,4230 J2.9 ; *.28 2372.79,3800.79 2474.16,3902.16 2502.16,3902.16 2520,3932 v1(2552,3964)
  Bottom Layer w10: v1(2552,3964) 2833,4245 3010,4245 J2.9
WMCU_TCK: *.25 J2.15 P4.4 | length 3741.5
  Top Layer w10: P4.4 1877.01,1248.01 2101,1472 2101,1732 1943,1890 1943,2855.25 1984,2896.25 2020.34,2896.25 2057.28,2933.18 2057.28,3078.99 2110,3131.71 2110,3260.09 2177.91,3328 2177.91,3379.41 2234,3435.5 2234,3500 2269,3535 2269,3680 2251.92,3705 ; *.25 2244,3716.59 ; v1(2412,3735) 2382,3705 2251.92,3705 ; 2244,3716.59 2251.92,3705 ; 2244,3716.59 2244,3705 2251.92,3705
  Bottom Layer w10: v1(2412,3735) 2412,3786.11 2484.89,3859 2924,3859 J2.15
WMCU_TMS: *.24 J2.13 P4.5 | length 4981.3
  Top Layer w10: *.24 2193.27,3695.73 2208,3681 2237,3681 2254,3664 2254,3577 v1(2212,3535)
  Bottom Layer w10: P4.5 1365,1567.01 1365,2416 1381,2432 1685,2432 2076,2823 2076,2864 1923,3017 1923,3303 1903,3323 1903,3421 2065,3427.64 2081.52,3444.16 2081.52,3485.52 2116,3520 2785,3520 2785,3535 ; v1(2212,3535) 2785,3535 ; J2.13 2800,3535 2785,3535
WMCU_TXD: *.19 J1.7 P4.7 | length 5191.7
  Top Layer w10: J1.7 1225,4045 ; v1(1566,3359) 1304.53,3620.47 1304.53,3808 1288,3824.53 1248,3824.53 1225,3847.53 1225,4045 ; P4.7 1492.01,1070 1152,1070 1110,1112 1110,3999 1136,4025 1205,4025 1225,4045 ; v1(2024,3552) 2024,3585 2059.97,3620.97 2081,3620.97 2094.84,3634.81 *.19
  Bottom Layer w10: v1(1566,3359) 1737.65,3359 1930.64,3552 v1(2024,3552)
pads on no net: J1.18 J1.20 J2.8 J2.20

## Text inside footprints (layer, text, board x,y; h text height)
J1: Top Overlay "20" at 1185,4445 h50 r90; Top Overlay "10" at 1285,4445 h50 r90; Top Overlay "1" at 1185,3405 h50 r90; Top Overlay "1" at 1185,3365 h50 r90; Top Overlay "1" at 1305,3405 h50 r90
J2: Top Overlay "20" at 2970,4445 h50 r90; Top Overlay "10" at 3070,4445 h50 r90; Top Overlay "1" at 2970,3405 h50 r90; Top Overlay "1" at 2970,3365 h50 r90; Top Overlay "1" at 3090,3405 h50 r90